# Altium PCB PCB_bai7.PcbDoc
Units mm, origin at the board's own origin, x right, y up, seen from the top; angles counter-clockwise.
Board outline 102.23 x 59.69 mm, 2 copper layers (Top Layer, Bottom Layer), stack 1.57 mm thick; 43 components, 27 nets, 110 pads, 0 vias.
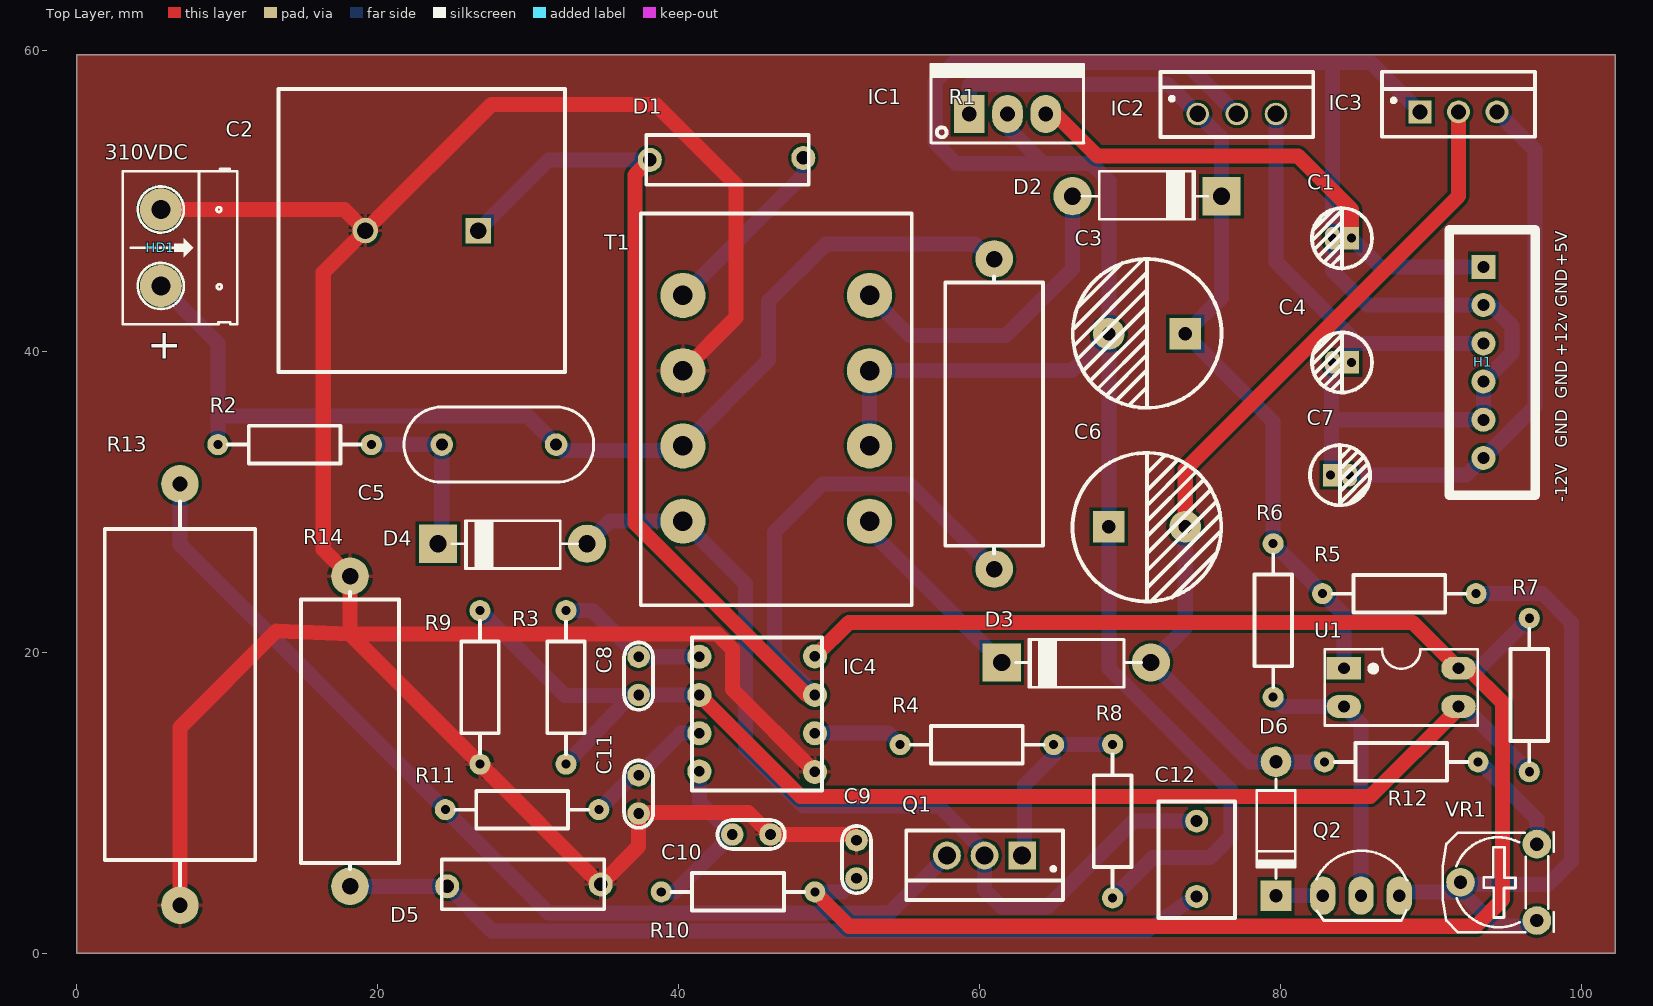
[diagram p0: Top Layer view]
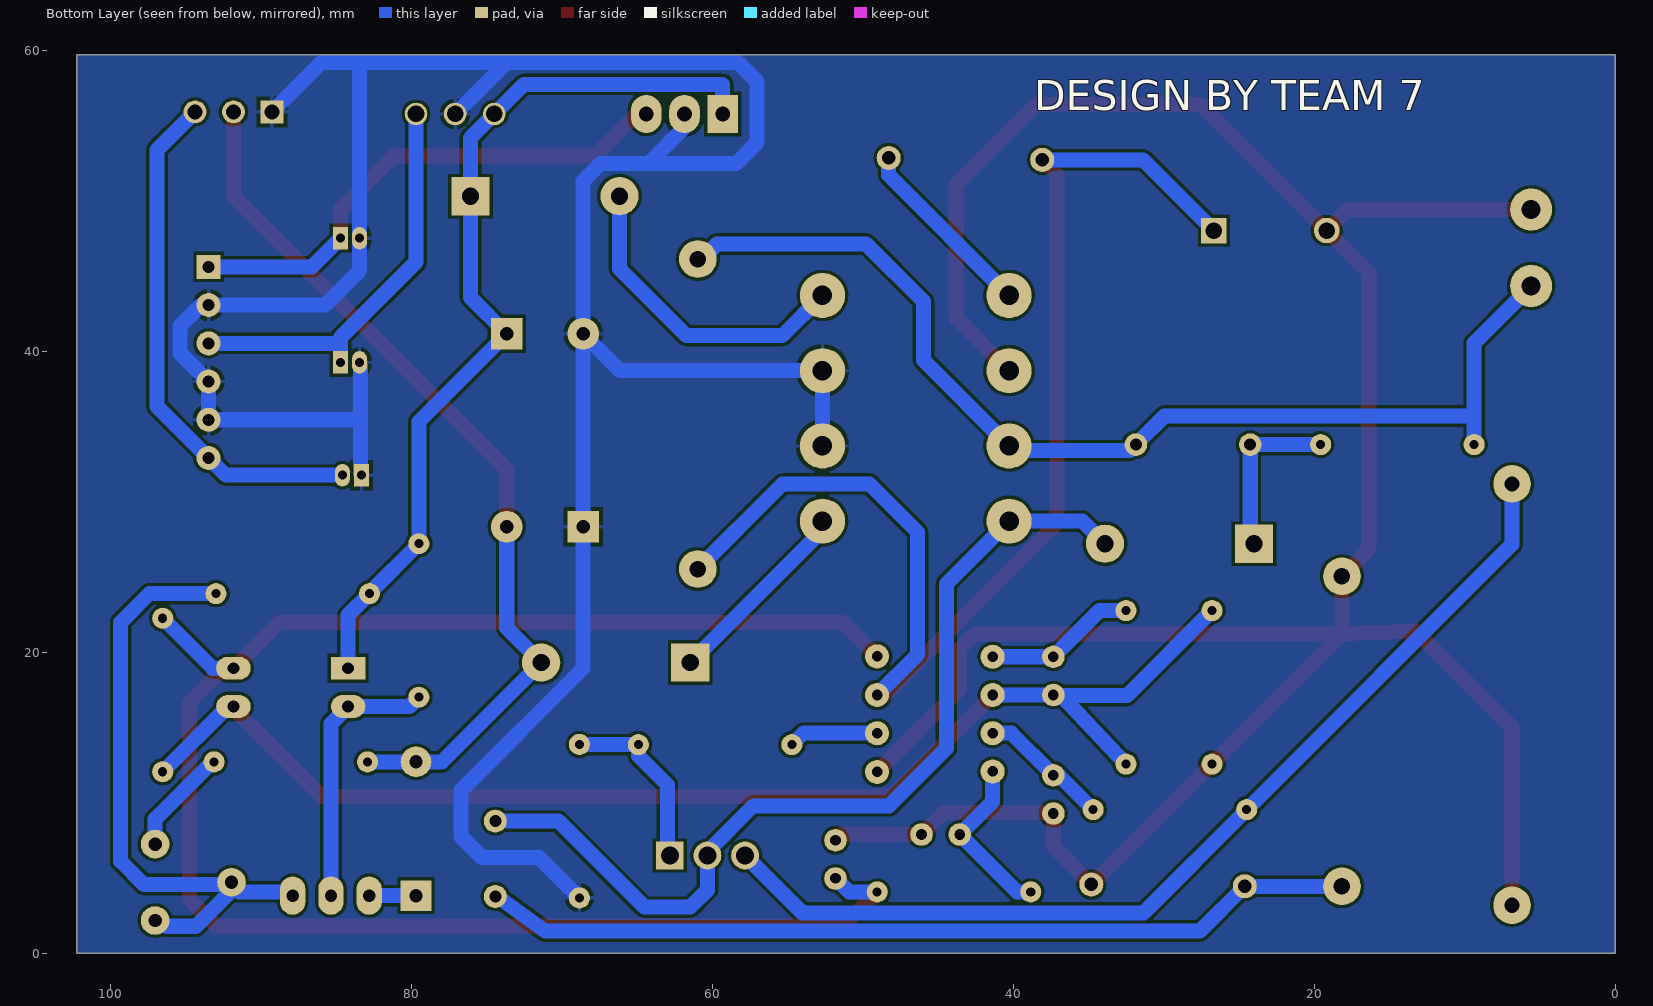
[diagram p1: Bottom Layer view, seen from below]
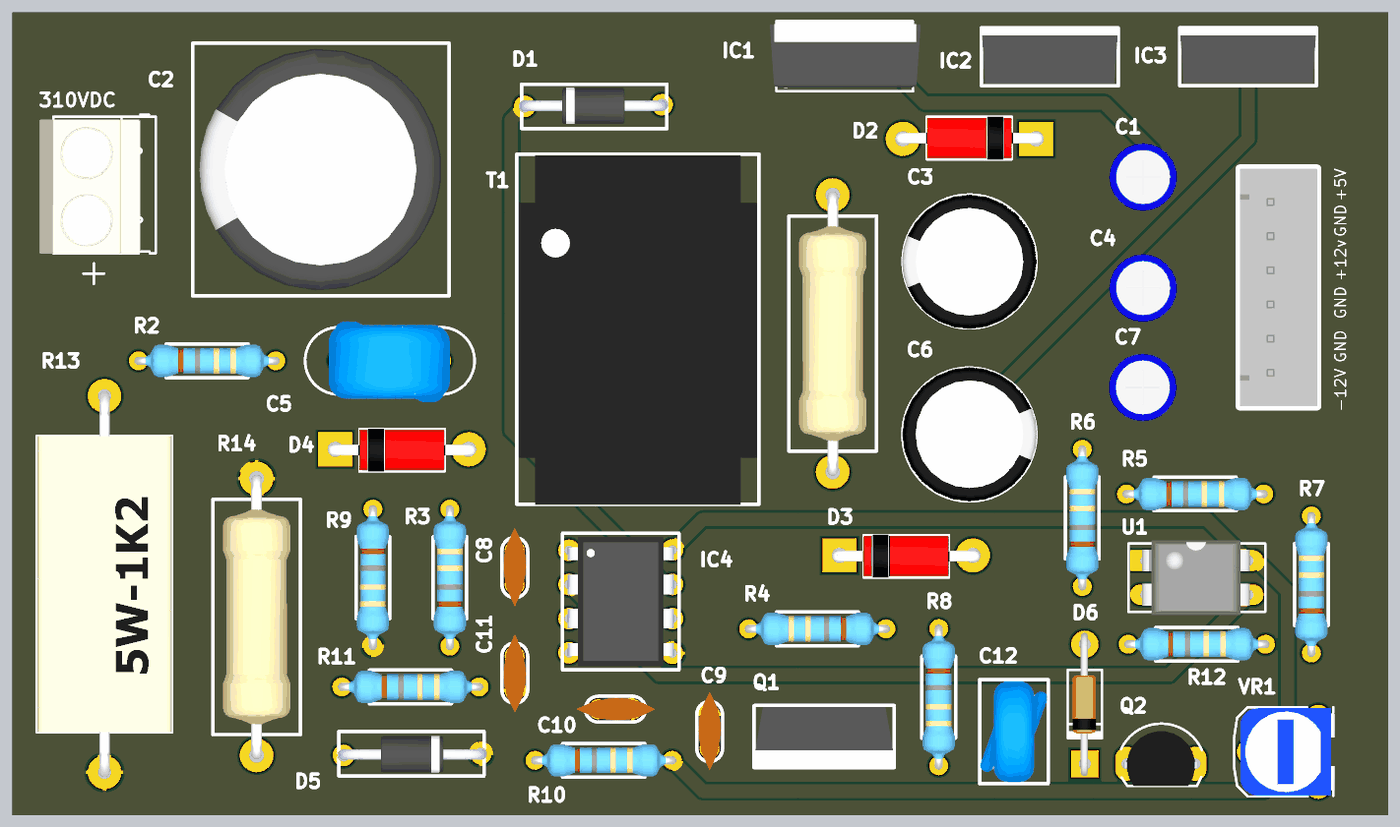
[diagram p2: 3D render of the assembled board from above, using the file's embedded part models]

## Layer stack, top to bottom
Top Solder: solder mask 0.01, Solder Resist, Dk 3.5
Top Layer: signal copper 0.035
Dielectric 1: dielectric 1.5, FR-4, Dk 4.8
Bottom Layer: signal copper 0.035
Bottom Solder: solder mask 0.01, Solder Resist, Dk 3.5

## Board outline
0,0 102.235,0 102.235,59.69 0,59.69

## Design rules (kind name [scope] priority, off if disabled: settings)
Clearance [All] p1: gap=0.2 ignorepadtopadclearanceinfootprint=FALSE
Height [All] p1: minheight=0 maxheight=42 prefheight=12.7
PolygonConnect [All] p1: connectstyle=Relief reliefconductorwidth=0.254 reliefentries=4 polygonreliefangle="90 Angle" airgapwidth=0.254
RoutingVias [All] p1: holewidth=0.3 width=0.6 viastyle="Through Hole" minholewidth=0.2 minwidth=0.4 maxholewidth=0.4 maxwidth=1
SolderMaskExpansion [All] p1: expansion=0.102
Width [All] p1: maxlimit=1 minlimit=0.2 preferedwidth=0.4
29 further rules are at their usual default settings.

## Components (designator, comment, footprint, x,y, rotation, side; value= is the part's Value field where it differs from the comment)
C1 "10uF" "tu hoa 4mm" 84.074,47.498 r180 top
C2 "100uF/400V" Cap_100uF/400V 22.927,48.006 r180 top
C3 "470uF" "tu hoa 10mm" 71.12,41.148 r180 top
C4 "10uF" "tu hoa 4mm" 84.074,39.243 r180 top
C5 "103/2kv" Cap_103/2kv 24.257,33.782 r0 top
C6 "470uF" "tu hoa 10mm" 71.12,28.321 r0 top
C7 "10uF" "tu hoa 4mm" 83.947,31.75 r0 top
C8 "101/100p" "tu gom" 37.338,18.415 r90 top
C9 "103" "tu gom" 51.816,6.223 r90 top
C10 "222" "tu gom" 44.831,7.874 r0 top
C11 "471/470p" "tu gom" 37.338,10.541 r270 top
C12 "102/2KV" Cap_102_2KV 74.422,6.263 r90 top
D1 "FR107" Diode_FR107 43.18,52.832 r180 top
D2 "FR207" "DIODE 2A" 76.708,50.292 r180 top
D3 "FR207" "DIODE 2A" 60.833,19.304 r0 top
D4 "FR207" "DIODE 2A" 23.368,27.198 r0 top
D5 "FR107" Diode_FR107 29.718,4.432 r0 top
D6 "5V" D1A 79.689,12.7 r90 top
H1 "Header 6P 2.54 Duc Thang" XH2.54M-6 93.472,45.593 r270 top
HD1 "Header 2" HED2 5.588,49.403 r270 top
IC1 "LM7805" QTO-220 59.309,55.753 r0 top
IC2 "LM7812" LM7812 77.089,55.753 r0 top
IC3 "LM7912" LM7912 91.821,55.893 r0 top
IC4 "UC3842" UC3842_DIP 45.212,15.875 r0 top
Q1 "IRF740" IRF740 60.325,6.477 r180 top
Q2 "C1815" TO92 85.344,3.81 r0 top value=C9014
R1 "150k/2W" "Tro Vach 2W" 60.96,35.814 r90 top
R2 "68k" "tro vach 1/4w" 14.478,33.782 r180 top
R3 "150k" "Tro vach 1/4w" 32.512,17.653 r270 top
R4 "22R" "tro vach 1/4w" 59.817,13.843 r0 top
R5 "47k" "tro vach 1/4w" 87.884,23.876 r180 top
R6 "10k" "tro vach 1/4w" 79.502,22.098 r270 top
R7 "10k" "tro vach 1/4w" 96.52,17.145 r270 top
R8 "22k" "tro vach 1/4w" 68.834,8.763 r90 top
R9 "3.9k" "tro vach 1/4w" 26.797,17.653 r90 top
R10 "10k" "tro vach 1/4w" 43.942,4.064 r180 top
R11 "1k" "tro vach 1/4w" 29.591,9.525 r180 top
R12 "10k" "tro vach 1/4w" 88.011,12.7 r180 top
R13 "0.22R/5W" "tro cong suat 5w" 6.858,17.175 r90 top
R14 "2k2/2W" "Tro Vach 2W" 18.161,14.732 r270 top
T1 "EE25" EE25_8_PIN 46.482,36.195 r0 top
U1 "OPTO PC817 DIP4" DIP4 84.137,18.923 r270 top value=PC817
VR1 "10K" "Bien Tro Tam Giac Dung" 97.028,2.159 r90 top

## Footprints (in the part's own frame and the unit in brackets; to place one, negate y for a bottom-side part, rotate by r counter-clockwise, add the part's x,y. Pads: shape width x height; smd on the part's side, far side on the other; paste and mask are expansions set on the pad)
"Bien Tro Tam Giac Dung" [mil] "RM065"
  round 75 hole 35: 1(0,0) 2(100,200) 3(200,0)
  silkscreen extent -31,-44 231,246, body extent -28,-50 228,228, height 279
Cap_100uF/400V [mm] "t? hóa 100uf/400v"
  rect 1.7x1.7 hole 1.1: 1(-3.75,0)
  round 1.7 hole 1.1: 2(3.75,0)
  silkscreen extent -9.53,-9.4 9.53,9.4, body extent -8.98,-9 9.02,9, height 40
Cap_102_2KV [mm] "T? cao áp 102/2KV"
  round 1.524 hole 0.8: 1(-2.5,0) 2(2.5,0)
  silkscreen extent -3.94,-2.54 3.81,2.54, body extent -3.82,-2.5 3.68,2.5, height 11.5
Cap_103/2kv [mm] "t? cao áp"
  round 1.5 hole 0.8: 1(0,0) 2(7.6,0)
  silkscreen extent -2.5,-2.5 10.1,2.5, body extent -0.74,-3.07 8.25,2.92, height 15
D1A [mil] "Diode 1A, W 100mil, L 350mil"
  round 80 hole 35: 1(0,0)
  rect 80x80 hole 35: 2(-350,0)
  silkscreen extent -305,-50 -45,50, body extent -386,-33 34,36, height 84
"DIODE 2A" [mil] "Diode 2A"
  round 100 hole 45: 1(415,0)
  rect 100x100 hole 45: 2(25,0)
  silkscreen extent 61,-65 391,60, body extent 4,-65 436,61, height 113
Diode_FR107 [mm] "Diode xung"
  round 1.6 hole 0.9: 1(-5.1,0) 2(5.1,0.127)
  silkscreen extent -5.46,-1.52 5.33,1.78, body extent -5.47,-1.27 5.47,1.42, height 2.69
DIP4 [mil] "W.300/L.400"
  rect 60x90 hole 31: 1(0,2.52)
  oval 60x90 hole 31: 2(100,2.52) 3(100,302.52) 4(0,302.52)
  silkscreen extent -50,-47 150,353, body extent -59,-7 159,307, height 170
EE25_8_PIN [mm]
  round 3 hole 1.3: 1(-6.2,7.5) 2(-6.2,2.5) 3(-6.2,-2.5) 4(-6.2,-7.5) 5(6.2,-7.5) 6(6.2,-2.5) 7(6.2,2.5) 8(6.2,7.5)
  silkscreen extent -9,-13.08 9,12.95, body extent -9.27,-13.13 8.85,12.87, height 20.1
HED2 [mil] "Header 2, 2 pin, hight 300mil, Pin to Pin 200, Colour Green"
  round 110 hole 50: 1(0,0) 2(200,0)
  silkscreen extent -106,-100 300,200, body extent -92,-140 302,155, height 394
IRF740 [mm] "mosfet N"
  rect 1.85x1.85 hole 1.2: 1(-2.5,0)
  round 1.85 hole 1.2: 2(0,0) 3(2.5,0)
  silkscreen extent -5.21,-1.67 5.21,2.95, body extent -5.12,-1.52 5.12,2.92, height 19.89
LM7812 [mm]
  round 1.5 hole 1.1: 1(-2.6,0) 2(0,0) 3(2.6,0)
  silkscreen extent -5.08,-1.52 5.08,2.79, body extent -5.08,-1.4 5.08,2.79, height 22.86
LM7912 [mil]
  rect 60x60 hole 39.37: 1(-100.39,0)
  round 60 hole 39.37: 2(0,0) 3(100.39,0)
  silkscreen extent -200,-65 200,105, body extent -200,-60 200,105, height 900
QTO-220 [mil] "TO-220 - 1-2-3"
  rect 80x100 hole 39: 1(0,0)
  oval 80x100 hole 39: 2(100,0) 3(200,0)
  silkscreen extent -100,-76 300,130, body extent -119,-64 322,121, height 755
TO92 [mil] "TO-92"
  oval 66x100 hole 32: 1(-100,0) 2(0,0) 3(100,0)
  silkscreen extent -117,-65 120,118, body extent -109,-66 109,95, height 245
"tro cong suat 5w" [mm]
  round 2.5 hole 1: 1(-14,0) 2(14,0)
  silkscreen extent -12.7,-5 12.83,5, body extent -14.34,-5 14.35,5, height 9
"tro vach 1/4w" [mm]
  round 1.4 hole 0.6: 1(-5.1,0) 2(5.1,0)
  silkscreen extent -4.39,-1.25 4.42,1.25, body extent -5.38,-1.2 5.38,1.2, height 2.41
"Tro vach 1/4w" [mm]
  round 1.4 hole 0.6: 1(-5.1,0) 2(5.1,0)
  silkscreen extent -4.39,-1.25 4.42,1.25, body extent -5.38,-1.2 5.38,1.2, height 2.41
"Tro Vach 2W" [mm]
  round 2.5 hole 1.1: 1(-10.3,0) 2(10.3,0)
  silkscreen extent -9.27,-3.25 9.14,3.25, body extent -10.56,-2.5 10.56,2.5, height 5.5
"tu gom" [mm] "Tu gom mini"
  round 1.5 hole 0.7: 1(-1.27,0) 2(1.27,0)
  silkscreen extent -2.25,-0.97 2.22,0.97, body extent -2.92,-0.85 2.92,0.85, height 6.12
"tu hoa 4mm" [mm]
  rect 1x1.5 hole 0.6: 1(-0.635,0)
  oval 1x1.5 hole 0.6: 2(0.635,0)
  silkscreen extent -2,-2 2.01,2.01, body extent -2.47,-2.47 2.58,2.58, height 14.81
"tu hoa 10mm" [mm]
  rect 2.1x2.1 hole 0.9: 1(-2.54,0)
  round 2.1 hole 0.9: 2(2.54,0)
  silkscreen extent -4.95,-4.96 4.93,4.92, body extent -5,-5 4.97,5, height 20.01
UC3842_DIP [mm]
  round 1.6 hole 0.7: 1(-3.84,3.81) 2(-3.84,1.27) 3(-3.84,-1.27) 4(-3.84,-3.81) 5(3.84,-3.84) 6(3.84,-1.27) 7(3.84,1.27) 8(3.84,3.84)
  silkscreen extent -4.32,-5.08 4.32,5.08, body extent -3.94,-4.79 3.94,4.79, height 5.08
XH2.54M-6 [mm]
  rect 1.6x1.6 hole 0.8: 1(0,0)
  round 1.6 hole 0.8: 2(2.54,0) 3(5.08,0) 4(7.62,0) 5(10.16,0) 6(12.7,0)
  silkscreen extent -2.48,-2.26 15.18,3.46, body extent -2.48,-2.26 15.18,3.48, height 6.91

## Part data
C1 C4 C7: library part "Tu Hoa 10uF 25V 4x7", "C?m", Chung_Loai=C?m, Don_Vi=Con, Ma_Hang=MH001349, So_Chan=2, Ten_Linh_Kien="T? Hóa 10uF 25V 4x7MM"
C2: library part cap_100uF/400V
C3 C6: library part "Tu Hoa 470uF 50V 10x17", "C?m", Chung_Loai=C?m, Don_Vi=Con, Ma_Hang=MH006866, So_Chan=2, Ten_Linh_Kien="T? Hóa 470uF 50V"
C5: library part cap_103/2kv
C8: library part "Tu gom 101 50V", "C?m", Chung_Loai=C?m, Don_Vi=Con, Ma_Hang=MH004764, So_Chan=2, Ten_Linh_Kien="T? g?m 101 0.1nF 50V"
C9: library part "Tu gom 103 50V", "C?m", Chung_Loai=C?m, Don_Vi=Con, Ma_Hang=MH000936, So_Chan=2, Ten_Linh_Kien="T? g?m 103 10nF 50V"
C10: library part "Tu gom 222 50V", "C?m", Chung_Loai=C?m, Don_Vi=Con, Ma_Hang=MH004770, So_Chan=2, Ten_Linh_Kien="T? g?m 222-2.2nF 50V"
C11: library part "Tu gom 471 50V", "C?m", Chung_Loai=C?m, Don_Vi=Con, Ma_Hang=MH004776, So_Chan=2, Ten_Linh_Kien="T? g?m 470P 471 50V"
C12: library part Cap_102/2KV, "T? cao áp"
D1 D5: library part Diode_FR107
D2 D3 D4: library part "Diode FR207", "C?m", Chung_Loai=C?m, Don_Vi=Con, Ma_Hang=MH005704, Ten_Linh_Kien="Diode FR207 2A 1000V ( DIP)"
D6: library part Zener
H1: "C?m", Chung_Loai=C?m, Don_Vi=Con, Ma_Hang=MH001972, Ten_Linh_Kien="Header 6P XH2.54-6P Ð?c Th?ng"
HD1: library part Hed2, "Header 2 (Green)"
IC1: library part LM78xx, "On ap +, from + 5 to + 24VDC", =LM7808
Q2: "NPN transistor", =C9012
R1: library part Res_150k/2W
R2: library part "Tro Vach 1/4W 5% 68k", "C?m", Chung_Loai=C?m, Don_Vi=Con, Ma_Hang=MH007332, So_Chan=2, Ten_Linh_Kien="Tr? V?ch 1/4w 5% 68k"
R3: library part "Tro Vach 1/4W 5% 150k", "C?m", Chung_Loai=C?m, Don_Vi=Con, Ma_Hang=MH007286, So_Chan=2, Ten_Linh_Kien="Tr? V?ch 1/4w 5% 150k"
R4: library part "Tro Vach 1/4W 5% 22R", "C?m", Chung_Loai=C?m, Don_Vi=Con, Ma_Hang=MH007302, So_Chan=2, Ten_Linh_Kien="Tr? V?ch 1/4w 5% 22R"
R5: library part "Tro Vach 1/4W 5% 47k", "C?m", Chung_Loai=C?m, Don_Vi=Con, Ma_Hang=MH004982, So_Chan=2, Ten_Linh_Kien="Tr? V?ch 1/4w 5% 47k"
R6 R7 R10 R12: library part "Tro Vach 1/4W 5% 10k", "Cam", Chung_Loai=C?m, Don_Vi=Con, Ma_Hang=MH007354, So_Chan=2, Ten_Linh_Kien="Tr? V?ch 1/4w 5% 10K"
R8: library part "Tro Vach 1/4W 5% 22k", "C?m", Chung_Loai=C?m, Don_Vi=Con, Ma_Hang=MH007301, So_Chan=2, Ten_Linh_Kien="Tr? V?ch 1/4w 5% 22k"
R9: library part "Tro Vach 1/4W 5% 3.9k", "C?m", Chung_Loai=C?m, Don_Vi=Con, Ma_Hang=MH007307, So_Chan=2, Ten_Linh_Kien="Tr? V?ch 1/4w 5% 3.9K"
R11: library part "Tro Vach 1/4W 5% 1k", "C?m", Chung_Loai=C?m, Don_Vi=Con, Ma_Hang=MH007390, So_Chan=2, Ten_Linh_Kien="Tr? V?ch 1/4w 5% 1k"
R13: library part "Tro Cong Suat 5W 5% 0.22R", "C?m", Chung_Loai=C?m, Don_Vi=Con, Ma_Hang=MH001094, So_Chan=2, Ten_Linh_Kien="Tr? S? 5w 5% 0.22R"
R14: library part res-2k2/2W
T1: library part "Transformer EE25_8pin"
U1: "Single Opto"
VR1: library part "Bien tro tam giac 10K Dung", "C?m", Chung_Loai=C?m, Don_Vi=Con, Ma_Hang=MH000919, Ten_Linh_Kien="Bi?n Tr? Tam Giác 103-10K RM065 (Chân Ð?ng)"

## Nets (pads, with @x,y where several pads share a name; then routed paths per layer and width w, separated by ;. In a path a pad name is that pad's centre, name@x,y a point inside that pad or via, vN(x,y) a via of type N, cw(c..) or ccw(c..) an arc to the next point about the centre after c; other vN are vias at no path point)
310V: C5.2 HD1.2 R1.2 R2.2 T1.3 | length 73.4
  Bottom Layer w1: HD1.2 9.378,40.533 9.378,35.687 ; R2.2 9.378,35.687 ; T1.3 45.974,39.387 45.974,43.307 49.784,47.117 59.69,47.117 60.655,46.152 R1.2@60.655,45.441 ; T1.3@40.386,33.381 32.258,33.381 C5.2 29.952,35.687 9.378,35.687
+5V: C1.1 H1.1 IC1.3 | length 34.4
  Top Layer w1: IC1.3 65.024,55.753 67.818,52.959 81.153,52.959 84.709,49.403 C1.1
  Bottom Layer w1: C1.1 86.614,45.593 H1.1
+12V: C4.1 H1.3 IC2.3 | length 27.4
  Bottom Layer w1: IC2.3 79.689,45.914 84.709,40.894 84.709,40.513 ; C4.1 84.709,40.513 ; H1.3 84.709,40.513
-12V: C7.2 H1.6 IC3.3 | length 34.8
  Bottom Layer w1: C7.2 92.329,31.75 H1.6 96.901,36.322 96.901,53.363 IC3.3
BA8: C12.2 D4.1 Q1.2 T1.4 | length 62
  Bottom Layer w1: D4.1 35.406,28.695 T1.4 44.45,24.527 44.45,13.589 48.26,9.779 57.277,9.779 60.325,6.731 Q1.2 60.325,4.191 61.468,3.048 64.516,3.048 70.231,8.763 C12.2
GND: C1.2 C3.2 C4.2 C6.1 C7.1 H1.2 H1.4 H1.5 IC1.2 IC2.2 IC3.1 R8.1 T1.6 T1.7 | length 190.6
  Bottom Layer w1: T1.6 T1.7 66.127,38.695 C3.2 ; IC1.2 61.849,54.864 64.262,52.451 ; R8.1 71.521,6.35 75.311,6.35 76.708,7.747 76.708,10.795 68.58,18.923 C6.1 C3.2 ; IC2.2 73.66,59.182 ; C7.1 83.382,31.82 83.382,35.814 ; C4.2 83.382,39.186 83.382,35.814 ; IC3.1 85.982,59.182 83.693,59.182 ; 64.262,52.451 58.42,52.451 57.023,53.848 57.023,57.912 58.293,59.182 73.66,59.182 ; 64.262,52.451 67.437,52.451 68.58,51.308 C3.2 ; 73.66,59.182 83.693,59.182 ; 83.382,35.814 83.763,35.433 H1.5 H1.4 95.377,39.878 95.377,41.656 93.98,43.053 H1.2 85.725,43.053 83.439,45.339 C1.2 83.439,58.928 83.693,59.182
GND1: C2.2 C9.2 C10.2 C11.2 D5.2 HD1.1 IC4.5 R9.1 R13.1 R14.1 T1.2 | length 193.6
  Top Layer w1: HD1.1 17.78,49.403 C2.2 ; R13.1 6.858,14.986 13.279,21.407 18.154,21.189 18.161,21.189 ; T1.2 43.815,42.228 43.815,51.054 38.481,56.388 27.559,56.388 C2.2 ; IC4.5 43.561,17.526 43.561,20.193 42.565,21.189 18.161,21.189 ; C9.2 51.435,7.874 C10.2 44.651,9.324 37.338,9.324 C11.2 37.338,7.079 D5.2 34.791,4.559 R9.1 18.161,21.189 ; 18.161,21.189 R14.1 16.383,26.81 16.383,45.212 C2.2
NetC5_1: C5.1 D4.2 R2.1 | length 11.4
  Bottom Layer w1: R2.1 C5.1 24.257,27.452 D4.2
NetC8_2: C8.2 IC4.1 R3.1 | length 9.4
  Bottom Layer w1: R3.1 34.27,22.753 C8.2@36.83,20.193 ; C8.2 IC4.1
NetC10_1: C10.1 IC4.4 R10.2 | length 11.4
  Bottom Layer w1: R10.2 39.751,4.064 C10.1 41.372,10.063 IC4.4
NetC11_1: C11.1 IC4.3 R11.1 | length 8.8
  Bottom Layer w1: R11.1 36.977,11.811 C11.1 40.132,14.605 IC4.3
NetC12_1: C12.1 D5.1 R14.2 | length 58.3
  Bottom Layer w1: R14.2 D5.1 27.586,1.464 71.125,1.464 74.381,3.82 C12.1@74.422,3.85
NetD1_1: D1.1 T1.1 | length 12.4
  Bottom Layer w1: T1.1 48.28,51.693 D1.1
NetD6_2: D6.2 Q2.1 | length 3.1
  Bottom Layer w1: D6.2 Q2.1
NetIC4_6: IC4.6 R4.1 | length 6
  Bottom Layer w1: IC4.6 53.955,14.605 R4.1
NetQ1_1: Q1.1 R4.2 R8.2 | length 12.2
  Bottom Layer w1: Q1.1 62.992,6.644 62.992,11.176 64.917,13.101 R4.2 68.814,13.843 R8.2
NetQ1_3: Q1.3 R11.2 R13.2 | length 66.7
  Bottom Layer w1: R13.2 6.858,27.158 R11.2 31.352,2.664 54.012,2.664 Q1.3
NetQ2_2: Q2.2 R6.2 U1.2 | length 18
  Bottom Layer w1: R6.2 80.117,16.383 U1.2 85.344,15.24 Q2.2
NetQ2_3: Q2.3 R5.1 VR1.1 VR1.2 | length 40
  Bottom Layer w1: Q2.3 88.138,4.064 VR1.2@91.44,4.064 ; R5.1 97.409,23.876 99.314,21.971 99.314,6.096 97.777,4.559 92.443,4.559 91.988,4.104 94.314,1.778 VR1.1@96.266,1.778
NetR12_1: R12.1 VR1.3 | length 6.9
  Bottom Layer w1: R12.1@93.599,12.319 97.028,8.89 VR1.3@97.028,6.858
Opto: C3.1 D2.2 IC1.1 IC2.1 R5.2 R6.1 U1.1 | length 60.8
  Bottom Layer w1: IC1.1 59.309,57.723 72.519,57.723 IC2.1 76.073,54.169 D2.2 76.073,43.561 C3.1 79.502,35.306 R6.1 82.784,23.916 R5.2 84.201,22.459 U1.1
OUT1: D2.1 T1.8 | length 21.3
  Bottom Layer w1: T1.8 55.356,41.021 61.722,41.021 66.167,45.466 D2.1
OUT2: D3.2 T1.5 | length 13
  Bottom Layer w1: T1.5 52.682,28.09 D3.2
VCC: C2.1 D1.2 IC4.7 R1.1 | length 85.1
  Top Layer w1: D1.2 37.084,51.709 37.084,28.575 48.514,17.145 IC4.7
  Bottom Layer w1: C2.1 31.376,52.705 D1.2 ; IC4.7 46.355,19.842 46.355,27.963 49.567,31.175 55.325,31.175 R1.1@61.157,25.343
VFB: C8.1 IC4.2 R3.2 R7.2 R9.2 U1.3 | length 85.7
  Top Layer w1: IC4.2 48.103,10.414 85.979,10.414 91.821,16.256 U1.3
  Bottom Layer w1: R9.2 32.433,17.117 C8.1@36.83,17.117 ; R3.2 C8.1@36.83,17.117 ; C8.1 IC4.2 ; C8.1@37.572,17.117 C8.1@36.83,17.117 ; U1.3 92.182,16.383 R7.2
VREF: C9.1 IC4.8 R7.1 R10.1 U1.4 | length 118.5
  Top Layer w1: R10.1 51.328,1.778 92.964,1.778 94.742,3.556 94.742,16.637 92.456,18.923 U1.4 88.773,21.971 51.308,21.971 IC4.8
  Bottom Layer w1: R10.1 50.927,4.064 C9.1 ; U1.4 93.198,18.923 R7.1
ZENNER: C6.2 D3.1 D6.1 IC3.2 R12.2 | length 59.5
  Top Layer w1: C6.2 73.66,32.131 91.821,50.292 IC3.2
  Bottom Layer w1: C6.2 73.66,21.59 D3.1 77.978,12.7 D6.1 R12.2 R12.2@83.038,12.7

## Polygon pours and split planes (outlines as drawn)
GND on Bottom Layer "bottomLayer-No Net2" (solid, remove dead copper, pour order 52): 0,0 102.235,0 102.235,59.69 0,59.69
no net on Bottom Layer "Bottom Layer-No Net" (solid, remove dead copper, pour order 46): 0,0 0,59.69 102.235,59.69 102.235,0
GND1 on Top Layer "Top Layer-No Net1" (solid, remove dead copper, pour order 51): 0,0 102.235,0 102.235,59.69 0,59.69
no net on Top Layer "Top Layer-No Net" (solid, remove dead copper, pour order 49): 0,0 0,59.69 102.235,59.69 102.235,0

## Silkscreen, mask and mechanical layers (free items; w line width, h text height)
Top Overlay:
  text "310VDC" at 1.858,52.705 h1
  text "+5V" at 99.06,45.593 h0.8 r90
  text "GND" at 99.06,42.926 h0.8 r90
  text "+12v" at 99.06,39.624 h0.8 r90
  text "+" at 4.699,39.497 h2
  text "GND" at 99.06,36.83 h0.8 r90
  text "GND" at 99.06,33.579 h0.8 r90
  text "-12V" at 99.06,29.947 h0.8 r90
Bottom Overlay:
  text "DESIGN BY TEAM 7" at 38.608,56.007 h2